# EAGLE board KeyVelocitysch (EAGLE 9.5.2)
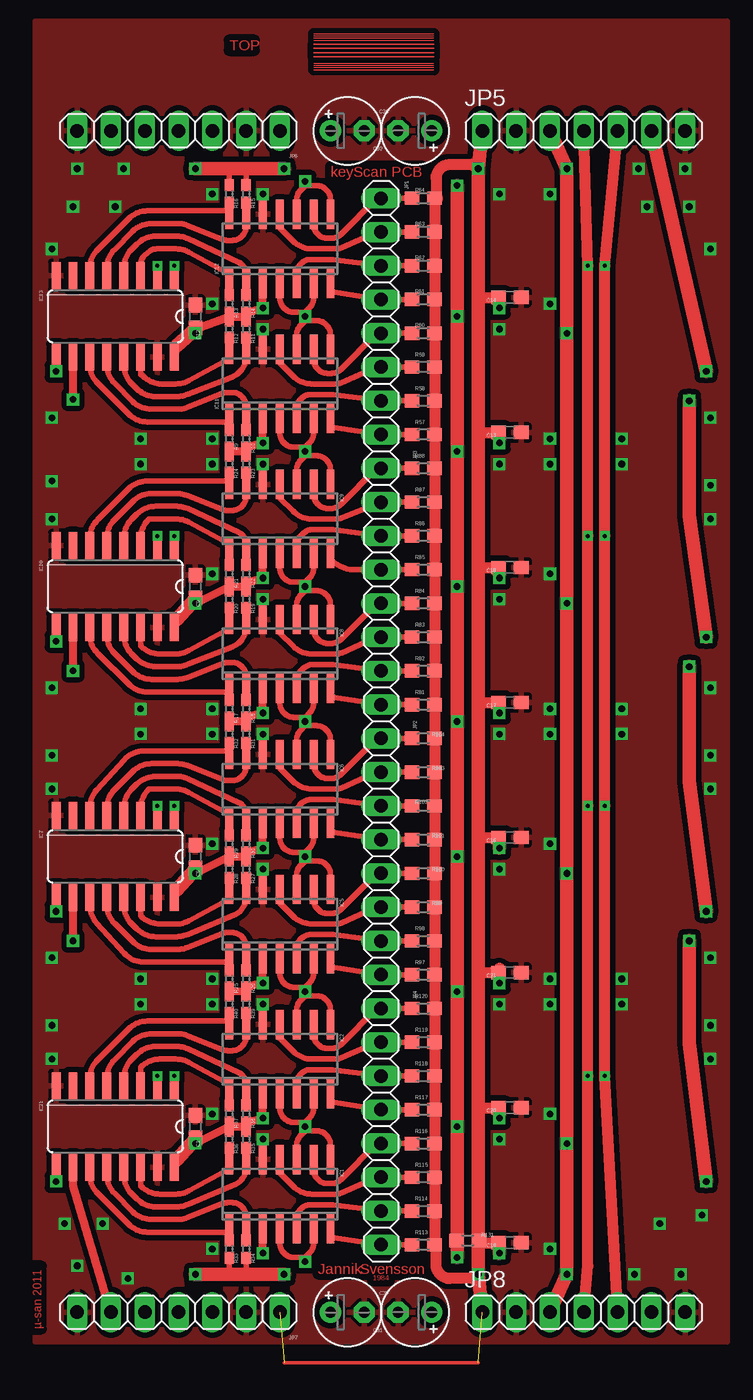
[diagram p0: board, top side]
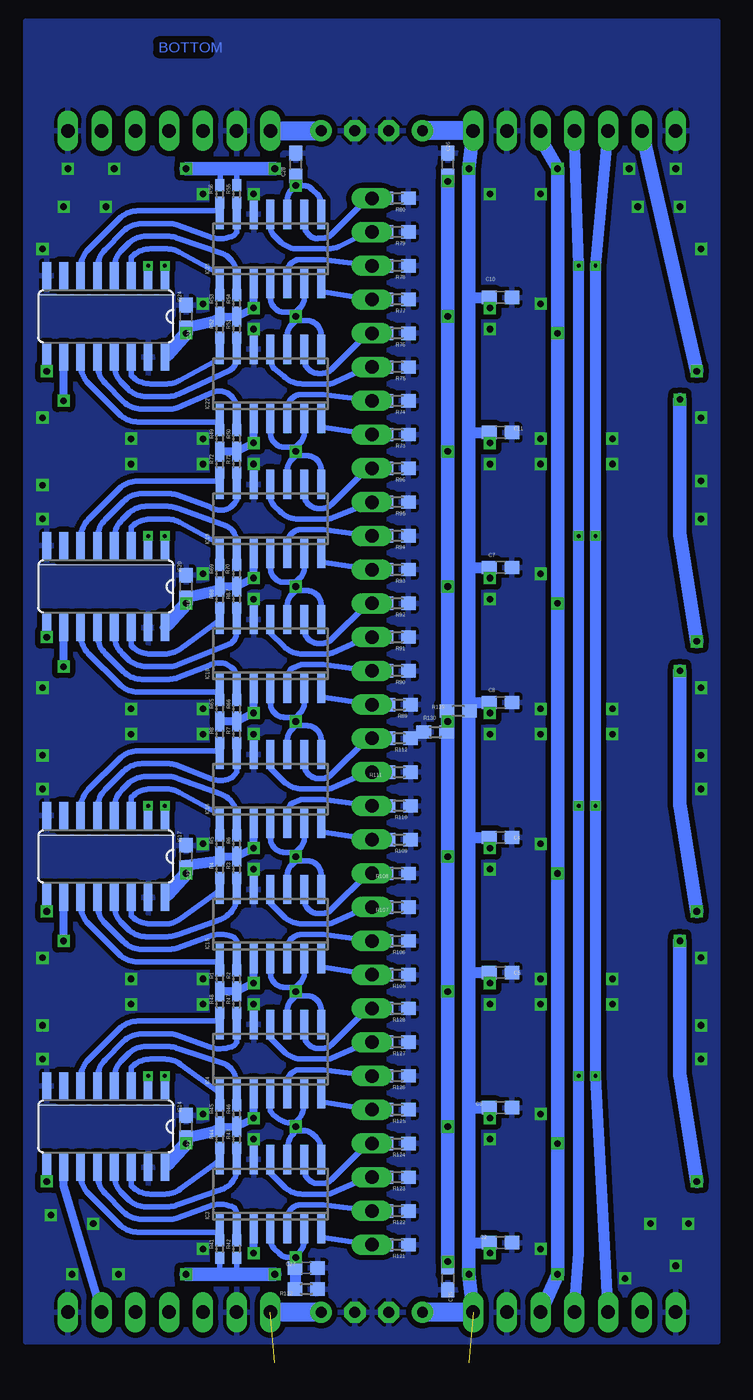
[diagram p1: board, bottom side, seen from below]

No outline drawn. Coordinates in mm, seen from the top.
Copper layers (1*16): Top 0.035mm / dielectric 1.5mm / Bottom 0.035mm
Design rules "default": minimum track width 10mil, minimum drill 24mil, track to track 8mil, track to pad 8mil, pad to pad 8mil, via to via 8mil, smd to smd 8mil, copper to edge 40mil, drill to drill 8mil, minimum pad ring 10mil, minimum via ring 8mil, stop-mask expansion 4mil, vias tented up to drill 0mil, thermal gap 10mil

## Footprints (pad centres in the part's own frame; a part is rotated, then mirrored left to right if it is on the bottom)
C0603 = smd 1.1 x 1: 1 -0.85,0; 2 0.85,0
E2,5-5 = drill 0.813 pad 1.6: + -1.27,0 | drill 0.813 pad 1.6 octagon: - 1.27,0
SO14 = smd 0.6 x 2.2: 1 -3.81,-2.6; 2 -2.54,-2.6; 3 -1.27,-2.6; 4 0,-2.6; 5 1.27,-2.6; 6 2.54,-2.6; 7 3.81,-2.6; 8 3.81,2.6; 9 2.54,2.6; 10 1.27,2.6; 11 0,2.6; 12 -1.27,2.6; 13 -2.54,2.6; 14 -3.81,2.6
SO16 = smd 0.66 x 2.032: 1 -4.445,-3.073; 2 -3.175,-3.073; 3 -1.905,-3.073; 4 -0.635,-3.073; 5 0.635,-3.073; 6 1.905,-3.073; 7 3.175,-3.073; 8 4.445,-3.073; 9 4.445,3.073; 10 3.175,3.073; 11 1.905,3.073; 12 0.635,3.073; 13 -0.635,3.073; 14 -1.905,3.073; 15 -3.175,3.073; 16 -4.445,3.073
1X08 = drill 1.016 long: 1 -8.89,0; 2 -6.35,0; 3 -3.81,0; 4 -1.27,0; 5 1.27,0; 6 3.81,0; 7 6.35,0; 8 8.89,0
1X07 = drill 1.016 long: 1 -7.62,0; 2 -5.08,0; 3 -2.54,0; 4 0,0; 5 2.54,0; 6 5.08,0; 7 7.62,0
R0402 = smd 0.9 x 0.7: 1 -0.65,0; 2 0.65,0
R0603 = smd 1.1 x 1: 1 -0.85,0; 2 0.85,0

## Placement (x,y rotation side)
C1  0u1  [C0603]  12.38,16.51 90 top
C2  0u1  [C0603]  16.67,7.78 0 bottom
C3  0u1  [C0603]  16.67,17.94 0 bottom
C4  0u1  [C0603]  16.67,38.26 0 bottom
C5  0u1  [C0603]  16.67,28.1 0 bottom
C6  0u1  [C0603]  12.38,36.83 90 top
C7  0u1  [C0603]  16.67,58.58 0 bottom
C8  0u1  [C0603]  16.67,48.42 0 bottom
C9  0u1  [C0603]  12.38,57.15 90 top
C10  0u1  [C0603]  16.67,78.9 0 bottom
C11  0u1  [C0603]  16.67,68.74 0 bottom
C12  0u1  [C0603]  12.38,77.47 90 top
C13  0u1  [C0603]  36.04,68.74 0 top
C14  0u1  [C0603]  36.04,78.9 0 top
C15  0u1  [C0603]  40.32,57.15 90 bottom
C16  0u1  [C0603]  36.04,38.26 0 top
C17  0u1  [C0603]  36.04,48.42 0 top
C18  0u1  [C0603]  36.04,58.58 0 top
C19  0u1  [C0603]  36.04,7.78 0 top
C20  0u1  [C0603]  36.04,17.94 0 top
C21  0u1  [C0603]  36.04,28.1 0 top
C22  0u1  [C0603]  40.32,36.83 90 bottom
C23  0u1  [C0603]  40.32,16.51 90 bottom
C24  0u1  [C0603]  40.32,77.47 90 bottom
C25  0u1  [C0603]  20.64,5.08 270 bottom
C26  0u1  [C0603]  20.64,88.9 90 bottom
C27  0u1  [C0603]  31.27,5.87 0 bottom
C28  0u1  [C0603]  32.07,88.9 90 bottom
C29  [E2,5-5]  23.81,91.44 0 top
C30  [E2,5-5]  23.81,2.54 0 top
C31  [E2,5-5]  28.89,2.54 180 top
C32  [E2,5-5]  28.89,91.44 180 top
IC1  LM339D  [SO14]  18.73,11.43 0 top
IC2  LM339D  [SO14]  18.73,21.59 0 top
IC3  LM339D  [SO14]  33.97,11.43 0 bottom
IC4  LM339D  [SO14]  33.97,21.59 0 bottom
IC5  LM339D  [SO14]  18.73,31.75 0 top
IC6  LM339D  [SO14]  18.73,41.91 0 top
IC7  74HC165D  [SO16]  6.35,36.83 180 top
IC8  LM339D  [SO14]  18.73,52.07 0 top
IC9  LM339D  [SO14]  18.73,62.23 0 top
IC10  74HC165D  [SO16]  6.35,57.15 180 top
IC11  LM339D  [SO14]  18.73,72.39 0 top
IC12  LM339D  [SO14]  18.73,82.55 0 top
IC13  74HC165D  [SO16]  6.35,77.47 180 top
IC14  74HC165D  [SO16]  46.35,16.51 180 bottom
IC15  LM339D  [SO14]  33.97,31.75 0 bottom
IC16  LM339D  [SO14]  33.97,41.91 0 bottom
IC17  74HC165D  [SO16]  46.35,36.83 180 bottom
IC18  LM339D  [SO14]  33.97,52.07 0 bottom
IC19  LM339D  [SO14]  33.97,62.23 0 bottom
IC20  74HC165D  [SO16]  46.35,57.15 180 bottom
IC21  74HC165D  [SO16]  6.35,16.51 180 top
IC22  LM339D  [SO14]  33.97,72.39 0 bottom
IC23  LM339D  [SO14]  33.97,82.55 0 bottom
IC24  74HC165D  [SO16]  46.35,77.47 180 bottom
JP1  [1X08]  26.35,77.47 270 top
JP2  [1X08]  26.35,36.83 270 top
JP3  [1X08]  26.35,57.15 270 top
JP4  [1X08]  26.35,16.51 270 top
JP5  [1X07]  41.59,91.44 0 top
JP6  [1X07]  11.11,91.44 180 top
JP7  [1X07]  11.11,2.54 180 top
JP8  [1X07]  41.59,2.54 0 top
R1  [R0402]  37.78,27.62 270 bottom
R2  [R0402]  36.51,27.62 270 bottom
R3  [R0402]  36.51,35.88 90 bottom
R4  [R0402]  37.78,35.88 90 bottom
R5  [R0402]  37.78,37.78 270 bottom
R6  [R0402]  36.51,37.78 270 bottom
R7  [R0402]  36.51,46.04 90 bottom
R8  [R0402]  37.78,46.04 90 bottom
R9  [R0402]  14.92,68.26 270 top
R10  [R0402]  16.19,68.26 270 top
R11  [R0402]  16.19,76.52 90 top
R12  [R0402]  14.92,76.52 90 top
R13  [R0402]  14.92,78.42 270 top
R14  [R0402]  16.19,78.42 270 top
R15  [R0402]  16.19,86.68 90 top
R16  [R0402]  14.92,86.68 90 top
R17  [R0402]  14.92,47.94 270 top
R18  [R0402]  16.19,47.94 270 top
R19  [R0402]  16.19,56.2 90 top
R20  [R0402]  14.92,56.2 90 top
R21  [R0402]  14.92,58.1 270 top
R22  [R0402]  16.19,58.1 270 top
R23  [R0402]  16.19,66.36 90 top
R24  [R0402]  14.92,66.36 90 top
R25  [R0402]  14.92,27.62 270 top
R26  [R0402]  16.19,27.62 270 top
R27  [R0402]  16.19,35.88 90 top
R28  [R0402]  14.92,35.88 90 top
R29  [R0402]  14.92,37.78 270 top
R30  [R0402]  16.19,37.78 270 top
R31  [R0402]  16.19,46.04 90 top
R32  [R0402]  14.92,46.04 90 top
R33  [R0402]  14.92,7.3 270 top
R34  [R0402]  16.19,7.3 270 top
R35  [R0402]  16.19,15.56 90 top
R36  [R0402]  14.92,15.56 90 top
R37  [R0402]  14.92,17.46 270 top
R38  [R0402]  16.19,17.46 270 top
R39  [R0402]  16.19,25.72 90 top
R40  [R0402]  14.92,25.72 90 top
R41  [R0402]  37.78,7.3 270 bottom
R42  [R0402]  36.51,7.3 270 bottom
R43  [R0402]  36.51,15.56 90 bottom
R44  [R0402]  37.78,15.56 90 bottom
R45  [R0402]  37.78,17.46 270 bottom
R46  [R0402]  36.51,17.46 270 bottom
R47  [R0402]  36.51,25.72 90 bottom
R48  [R0402]  37.78,25.72 90 bottom
R49  [R0402]  37.78,68.26 270 bottom
R50  [R0402]  36.51,68.26 270 bottom
R51  [R0402]  36.51,76.52 90 bottom
R52  [R0402]  37.78,76.52 90 bottom
R53  [R0402]  37.78,78.42 270 bottom
R54  [R0402]  36.51,78.42 270 bottom
R55  [R0402]  36.51,86.68 90 bottom
R56  [R0402]  37.78,86.68 90 bottom
R57  [R0603]  29.53,68.58 0 top
R58  [R0603]  29.53,71.12 0 top
R59  [R0603]  29.53,73.66 0 top
R60  [R0603]  29.53,76.2 0 top
R61  [R0603]  29.53,78.74 0 top
R62  [R0603]  29.53,81.28 0 top
R63  [R0603]  29.53,83.82 0 top
R64  [R0603]  29.53,86.36 0 top
R65  [R0402]  37.78,47.94 270 bottom
R66  [R0402]  36.51,47.94 270 bottom
R67  [R0402]  36.51,56.2 90 bottom
R68  [R0402]  37.78,56.2 90 bottom
R69  [R0402]  37.78,58.1 270 bottom
R70  [R0402]  36.51,58.1 270 bottom
R71  [R0402]  36.51,66.36 90 bottom
R72  [R0402]  37.78,66.36 90 bottom
R73  [R0603]  24.45,68.58 180 bottom
R74  [R0603]  24.45,71.12 180 bottom
R75  [R0603]  24.45,73.66 180 bottom
R76  [R0603]  24.45,76.2 180 bottom
R77  [R0603]  24.45,78.74 180 bottom
R78  [R0603]  24.45,81.28 180 bottom
R79  [R0603]  24.45,83.82 180 bottom
R80  [R0603]  24.45,86.36 180 bottom
R81  [R0603]  29.53,48.26 0 top
R82  [R0603]  29.53,50.8 0 top
R83  [R0603]  29.53,53.34 0 top
R84  [R0603]  29.53,55.88 0 top
R85  [R0603]  29.53,58.42 0 top
R86  [R0603]  29.53,60.96 0 top
R87  [R0603]  29.53,63.5 0 top
R88  [R0603]  29.53,66.04 0 top
R89  [R0603]  24.29,48.26 180 bottom
R90  [R0603]  24.45,50.8 180 bottom
R91  [R0603]  24.45,53.34 180 bottom
R92  [R0603]  24.45,55.88 180 bottom
R93  [R0603]  24.45,58.42 180 bottom
R94  [R0603]  24.45,60.96 180 bottom
R95  [R0603]  24.45,63.5 180 bottom
R96  [R0603]  24.45,66.04 180 bottom
R97  [R0603]  29.53,27.94 0 top
R98  [R0603]  29.53,30.48 0 top
R99  [R0603]  29.53,33.02 0 top
R100  [R0603]  29.53,35.56 0 top
R101  [R0603]  29.53,38.1 0 top
R102  [R0603]  29.53,40.64 0 top
R103  [R0603]  29.53,43.18 0 top
R104  [R0603]  29.53,45.72 0 top
R105  [R0603]  24.45,27.94 180 bottom
R106  [R0603]  24.45,30.48 180 bottom
R107  [R0603]  24.45,33.02 180 bottom
R108  [R0603]  24.45,35.56 180 bottom
R109  [R0603]  24.29,38.1 180 bottom
R110  [R0603]  24.29,40.64 180 bottom
R111  [R0603]  24.29,43.18 180 bottom
R112  [R0603]  24.29,45.72 180 bottom
R113  [R0603]  29.53,7.62 0 top
R114  [R0603]  29.53,10.16 0 top
R115  [R0603]  29.53,12.7 0 top
R116  [R0603]  29.53,15.24 0 top
R117  [R0603]  29.53,17.78 0 top
R118  [R0603]  29.53,20.32 0 top
R119  [R0603]  29.53,22.86 0 top
R120  [R0603]  29.53,25.4 0 top
R121  [R0603]  24.45,7.62 180 bottom
R122  [R0603]  24.45,10.16 180 bottom
R123  [R0603]  24.45,12.7 180 bottom
R124  [R0603]  24.45,15.24 180 bottom
R125  [R0603]  24.45,17.78 180 bottom
R126  [R0603]  24.45,20.32 180 bottom
R127  [R0603]  24.45,22.86 180 bottom
R128  [R0603]  24.45,25.4 180 bottom
R129  4k7  [R0603]  19.84,47.78 0 bottom
R130  1k  [R0603]  21.59,46.2 0 bottom
R131  1k  [R0603]  32.86,7.94 0 top
R132  4k7  [R0603]  31.27,4.29 180 bottom

## Library data of the parts
C1-C32 R1-R132 = rcl
IC1-IC6 IC8 IC9 IC11 IC12 IC15 IC16 IC18 IC19 IC22 IC23 = linear
IC7 IC10 IC13 IC14 IC17 IC20 IC21 IC24 = 74xx-eu
JP1-JP8 = pinhead

## Nets
+5V: C1.1 C2.1 C3.1 C4.1 C5.1 C6.1 C7.1 C8.1 C9.1 C10.1 C11.1 C12.1 C13.1 C14.1 C15.1 C16.1 C17.1 C18.1 C19.1 C20.1 C21.1 C22.1 C23.1 C24.1 C29.+ C30.+ C31.+ C32.+ IC1.3 IC2.3 IC3.3 IC4.3 IC5.3 IC6.3 IC7.16 IC8.3 IC9.3 IC10.16 IC11.3 IC12.3 IC13.16 IC14.16 IC15.3 IC16.3 IC17.16 IC18.3 IC19.3 IC20.16 IC21.16 IC22.3 IC23.3 IC24.16 JP5.1 JP5.3 JP6.1 JP6.3 JP7.1 JP7.3 JP8.1 JP8.3 R1.2 R2.2 R3.2 R4.2 R5.2 R6.2 R7.2 R8.2 R9.2 R10.2 R11.2 R12.2 R13.2 R14.2 R15.2 R16.2 R17.2 R18.2 R19.2 R20.2 R21.2 R22.2 R23.2 R24.2 R25.2 R26.2 R27.2 R28.2 R29.2 R30.2 R31.2 R32.2 R33.2 R34.2 R35.2 R36.2 R37.2 R38.2 R39.2 R40.2 R41.2 R42.2 R43.2 R44.2 R45.2 R46.2 R47.2 R48.2 R49.2 R50.2 R51.2 R52.2 R53.2 R54.2 R55.2 R56.2 R57.2 R58.2 R59.2 R60.2 R61.2 R62.2 R63.2 R64.2 R65.2 R66.2 R67.2 R68.2 R69.2 R70.2 R71.2 R72.2 R81.2 R82.2 R83.2 R84.2 R85.2 R86.2 R87.2 R88.2 R97.2 R98.2 R99.2 R100.2 R101.2 R102.2 R103.2 R104.2 R113.2 R114.2 R115.2 R116.2 R117.2 R118.2 R119.2 R120.2 R129.2 R131.2
CLK_A: IC7.2 IC10.2 IC13.2 IC21.2 JP6.5 JP7.5
CLK_B: IC14.2 IC17.2 IC20.2 IC24.2 JP5.5 JP8.5
DA1: IC12.14 IC13.6 R16.1
DA8: IC11.1 IC13.11 R9.1
DA9: IC9.14 IC10.6 R24.1
DA16: IC8.1 IC10.11 R17.1
DA17: IC6.14 IC7.6 R32.1
DA24: IC5.1 IC7.11 R25.1
DA25: IC2.14 IC21.6 R40.1
DA32: IC1.1 IC21.11 R33.1
DB1: IC23.14 IC24.6 R56.1
DB8: IC22.1 IC24.11 R49.1
DB9: IC19.14 IC20.6 R72.1
DB16: IC18.1 IC20.11 R65.1
DB17: IC16.14 IC17.6 R8.1
DB24: IC15.1 IC17.11 R1.1
DB25: IC4.14 IC14.6 R48.1
DB32: IC3.1 IC14.11 R41.1
DIN_A: IC21.10 JP7.6
DIN_B: IC14.10 JP8.6
DOUT_A: IC13.9 JP6.6
DOUT_B: IC24.9 JP5.6
GND: C1.2 C2.2 C3.2 C4.2 C5.2 C6.2 C7.2 C8.2 C9.2 C10.2 C11.2 C12.2 C13.2 C14.2 C15.2 C16.2 C17.2 C18.2 C19.2 C20.2 C21.2 C22.2 C23.2 C24.2 C25.2 C26.2 C27.2 C28.2 C29.- C30.- C31.- C32.- IC1.12 IC2.12 IC3.12 IC4.12 IC5.12 IC6.12 IC7.8 IC7.15 IC8.12 IC9.12 IC10.8 IC10.15 IC11.12 IC12.12 IC13.8 IC13.15 IC14.8 IC14.15 IC15.12 IC16.12 IC17.8 IC17.15 IC18.12 IC19.12 IC20.8 IC20.15 IC21.8 IC21.15 IC22.12 IC23.12 IC24.8 IC24.15 JP5.2 JP5.7 JP6.2 JP6.7 JP7.2 JP7.7 JP8.2 JP8.7 R73.1 R74.1 R75.1 R76.1 R77.1 R78.1 R79.1 R80.1 R89.1 R90.1 R91.1 R92.1 R93.1 R94.1 R95.1 R96.1 R105.1 R106.1 R107.1 R108.1 R109.1 R110.1 R111.1 R112.1 R121.1 R122.1 R123.1 R124.1 R125.1 R126.1 R127.1 R128.1 R130.1 R132.1
KI1: IC12.9 IC23.9 JP1.1 R64.1 R80.2
KI2: IC12.11 IC23.11 JP1.2 R63.1 R79.2
KI3: IC12.5 IC23.5 JP1.3 R62.1 R78.2
KI4: IC12.7 IC23.7 JP1.4 R61.1 R77.2
KI5: IC11.9 IC22.9 JP1.5 R60.1 R76.2
KI6: IC11.11 IC22.11 JP1.6 R59.1 R75.2
KI7: IC11.5 IC22.5 JP1.7 R58.1 R74.2
KI8: IC11.7 IC22.7 JP1.8 R57.1 R73.2
KI9: IC9.9 IC19.9 JP3.1 R88.1 R96.2
KI10: IC9.11 IC19.11 JP3.2 R87.1 R95.2
KI11: IC9.5 IC19.5 JP3.3 R86.1 R94.2
KI12: IC9.7 IC19.7 JP3.4 R85.1 R93.2
KI13: IC8.9 IC18.9 JP3.5 R84.1 R92.2
KI14: IC8.11 IC18.11 JP3.6 R83.1 R91.2
KI15: IC8.5 IC18.5 JP3.7 R82.1 R90.2
KI16: IC8.7 IC18.7 JP3.8 R81.1 R89.2
KI17: IC6.9 IC16.9 JP2.1 R104.1 R112.2
KI18: IC6.11 IC16.11 JP2.2 R103.1 R111.2
KI19: IC6.5 IC16.5 JP2.3 R102.1 R110.2
KI20: IC6.7 IC16.7 JP2.4 R101.1 R109.2
KI21: IC5.9 IC15.9 JP2.5 R100.1 R108.2
KI22: IC5.11 IC15.11 JP2.6 R99.1 R107.2
KI23: IC5.5 IC15.5 JP2.7 R98.1 R106.2
KI24: IC5.7 IC15.7 JP2.8 R97.1 R105.2
KI25: IC2.9 IC4.9 JP4.1 R120.1 R128.2
KI26: IC2.11 IC4.11 JP4.2 R119.1 R127.2
KI27: IC2.5 IC4.5 JP4.3 R118.1 R126.2
KI28: IC2.7 IC4.7 JP4.4 R117.1 R125.2
KI29: IC1.9 IC3.9 JP4.5 R116.1 R124.2
KI30: IC1.11 IC3.11 JP4.6 R115.1 R123.2
KI31: IC1.5 IC3.5 JP4.7 R114.1 R122.2
KI32: IC1.7 IC3.7 JP4.8 R113.1 R121.2
LATCH_A: IC7.1 IC10.1 IC13.1 IC21.1 JP6.4 JP7.4
LATCH_B: IC14.1 IC17.1 IC20.1 IC24.1 JP5.4 JP8.4
N$1: IC14.9 IC17.10
N$2: IC17.9 IC20.10
N$4: IC12.13 IC13.5 R15.1
N$5: IC20.9 IC24.10
N$9: IC12.2 IC13.4 R14.1
N$10: IC12.1 IC13.3 R13.1
N$11: IC11.14 IC13.14 R12.1
N$12: IC7.10 IC21.9
N$13: IC11.13 IC13.13 R11.1
N$14: IC11.2 IC13.12 R10.1
N$17: IC8.2 IC10.12 R18.1
N$18: IC8.13 IC10.13 R19.1
N$19: IC8.14 IC10.14 R20.1
N$20: IC9.1 IC10.3 R21.1
N$21: IC9.2 IC10.4 R22.1
N$22: IC7.9 IC10.10
N$23: IC9.13 IC10.5 R23.1
N$25: IC10.9 IC13.10
N$27: IC5.2 IC7.12 R26.1
N$28: IC5.13 IC7.13 R27.1
N$29: IC5.14 IC7.14 R28.1
N$30: IC6.1 IC7.3 R29.1
N$33: IC6.2 IC7.4 R30.1
N$35: IC6.13 IC7.5 R31.1
N$38: IC1.2 IC21.12 R34.1
N$39: IC1.13 IC21.13 R35.1
N$40: IC1.14 IC21.14 R36.1
N$41: IC2.1 IC21.3 R37.1
N$42: IC2.2 IC21.4 R38.1
N$43: IC2.13 IC21.5 R39.1
N$46: IC22.2 IC24.12 R50.1
N$47: IC22.13 IC24.13 R51.1
N$48: IC22.14 IC24.14 R52.1
N$49: IC23.1 IC24.3 R53.1
N$50: IC23.2 IC24.4 R54.1
N$51: IC23.13 IC24.5 R55.1
N$54: IC18.2 IC20.12 R66.1
N$55: IC18.13 IC20.13 R67.1
N$56: IC18.14 IC20.14 R68.1
N$57: IC19.1 IC20.3 R69.1
N$58: IC19.2 IC20.4 R70.1
N$59: IC19.13 IC20.5 R71.1
N$62: IC15.2 IC17.12 R2.1
N$63: IC15.13 IC17.13 R3.1
N$64: IC15.14 IC17.14 R4.1
N$65: IC16.1 IC17.3 R5.1
N$66: IC16.2 IC17.4 R6.1
N$67: IC16.13 IC17.5 R7.1
N$70: IC3.2 IC14.12 R42.1
N$71: IC3.13 IC14.13 R43.1
N$72: IC3.14 IC14.14 R44.1
N$73: IC4.1 IC14.3 R45.1
N$74: IC4.2 IC14.4 R46.1
N$75: IC4.13 IC14.5 R47.1
VREF_A_COMP: C25.1 C26.1 IC1.4 IC1.6 IC1.8 IC1.10 IC2.4 IC2.6 IC2.8 IC2.10 IC5.4 IC5.6 IC5.8 IC5.10 IC6.4 IC6.6 IC6.8 IC6.10 IC8.4 IC8.6 IC8.8 IC8.10 IC9.4 IC9.6 IC9.8 IC9.10 IC11.4 IC11.6 IC11.8 IC11.10 IC12.4 IC12.6 IC12.8 IC12.10 R129.1 R130.2
VREF_B_COMP: C27.1 C28.1 IC3.4 IC3.6 IC3.8 IC3.10 IC4.4 IC4.6 IC4.8 IC4.10 IC15.4 IC15.6 IC15.8 IC15.10 IC16.4 IC16.6 IC16.8 IC16.10 IC18.4 IC18.6 IC18.8 IC18.10 IC19.4 IC19.6 IC19.8 IC19.10 IC22.4 IC22.6 IC22.8 IC22.10 IC23.4 IC23.6 IC23.8 IC23.10 R131.1 R132.2

## Tracks (layer width: path | path; a pad name or v marks a point on that pad's centre or on a via)
+5V  (via drill 0.5)  (3 unrouted)
  Top 0.254: 19.05,-1.27 33.66,-1.27
  Top 0.406: IC13.16 10.79,73.98 10.69,74.4 | R29.2 14.92,37.15 | 14.92,36.83 R28.2 | 16.19,46.67 R31.2 16.19,46.99 R18.2 | 14.92,46.67 R32.2 R17.2 | 14.92,56.83 R20.2 14.92,57.15 | 16.19,66.99 R23.2 16.19,67.31 R10.2 | 14.92,66.99 R24.2 R9.2 | 16.19,56.83 R19.2 16.19,57.15 R22.2 | 16.19,77.15 R11.2 16.19,77.47 R14.2 | 14.92,77.15 R12.2 14.92,77.47 | 16.19,87.31 R15.2 16.19,88.58 | 16.19,36.51 R27.2 16.19,36.83 R30.2 | 14.92,26.99 R25.2 R40.2 | 16.18,26.66 16.19,26.99 R26.2 R39.2 | 16.19,16.19 R35.2 16.19,16.51 R38.2 | 14.92,16.19 R36.2 14.92,16.51 | 16.19,6.67 R34.2 16.19,5.4 | R114.2 30.48,10.16 30.38,10.06 | R115.2 30.16,12.7 30.38,12.48 | R116.2 30.48,15.24 30.38,15.14 | R117.2 30.48,17.78 30.38,17.68 | R118.2 30.48,20.32 30.38,20.22 | R119.2 30.48,22.86 30.38,22.76 | R120.2 30.16,25.4 30.38,25.18 | R97.2 30.48,27.94 30.38,27.84 | R98.2 30.48,30.48 30.38,30.38 | R99.2 30.48,33.02 30.38,32.92 | R100.2 30.48,35.56 30.38,35.46 | R101.2 30.48,38.1 30.38,38 | R102.2 30.48,40.64 30.38,40.54 | R103.2 30.48,43.18 30.38,43.08 | R104.2 30.48,45.72 30.38,45.62 | R81.2 30.48,48.26 30.38,48.16 | R82.2 30.48,50.8 30.38,50.7 | R83.2 30.48,53.34 30.38,53.24 | R84.2 30.48,55.88 30.38,55.78 | R85.2 30.48,58.42 30.38,58.32 | R86.2 30.48,60.96 30.38,60.86 | R87.2 30.48,63.5 30.38,63.4 | R88.2 30.48,66.04 30.38,65.94 | R57.2 30.48,68.58 30.38,68.48 | R58.2 30.48,71.12 30.38,71.02 | R59.2 30.48,73.66 30.38,73.56 | R60.2 30.48,76.2 30.38,76.1 | R61.2 30.48,78.74 30.38,78.64 | R62.2 30.48,81.28 30.38,81.18 | R63.2 30.48,83.82 30.38,83.72 | 30.48,86.36 30.38,86.26 | 14.92,88.58 R16.2 | 14.92,5.4 R33.2 | 35.24,78.9 35.24,78.42 | 12.38,36.04 C6.1 v12.38,35.56 | 33.66,7.94 R131.2
  Top 0.406: 35.24,68.26 v35.24,67.94 | 12.38,76.68 C12.1 v12.38,76.2 | 12.38,56.36 C9.1 v12.38,55.88 | 35.24,48.42 35.08,48.42 35.24,48.26 v35.24,47.62
  Top 0.61: IC2.3 v17.46,17.14 R38.2 | v17.46,6.99 IC1.3 | IC6.3 v17.46,37.47 R30.2 | IC5.3 v17.46,27.3 R26.2 | IC9.3 v17.46,57.78 R22.2 | IC8.3 v17.46,47.62 R18.2 | IC12.3 v17.46,78.11 R14.2 | IC11.3 v17.46,67.94 R10.2 | 10.95,75.25 IC13.16 | 14.92,36.83 16.19,36.83 | 14.92,36.83 R29.2 | 16.19,46.99 14.92,46.99 R17.2 | 14.92,57.15 16.19,57.15 | 14.92,57.15 R21.2 | 16.19,67.31 14.92,67.31 R9.2 | 14.92,77.47 16.19,77.47 | 14.92,77.47 R13.2 | 10.95,34.29 IC7.16 | IC21.16 10.95,13.97 | 10.95,54.61 IC10.16 | 16.18,26.66 14.92,26.67 R25.2 | 14.92,16.51 R37.2 | 14.92,16.51 16.19,16.51 | v12.38,35.56 14.92,36.83 | v12.38,15.24 14.92,16.51 | v12.38,55.88 14.92,57.15 | 12.38,76.52 14.92,77.47 | C17.1 v35.24,47.62
  Top 0.813: C12.1 12.38,76.52 | 30.38,10.06 R113.2 | 30.38,12.48 R114.2 | 30.38,15.14 R115.2 | 30.38,17.68 R116.2 | 30.38,20.22 R117.2 | 30.38,22.76 R118.2 | 30.38,25.18 R119.2 | 30.38,27.84 R120.2 | 30.38,30.38 R97.2 | 30.38,32.92 R98.2 | 30.38,35.46 R99.2 | 30.38,38 R100.2 | 30.38,40.54 R101.2 | 30.38,43.08 R102.2 | 30.38,45.62 R103.2 | 30.38,48.16 R104.2 | 30.38,50.7 R81.2 | 30.38,53.24 R82.2 | 30.38,55.78 R83.2 | 30.38,58.32 R84.2 | 30.38,60.86 R85.2 | 30.38,63.4 R86.2 | 30.38,65.94 R87.2 | 30.38,68.48 R88.2 | 30.38,71.02 R57.2 | 30.38,73.56 R58.2 | 30.38,76.1 R59.2 | 30.38,78.64 R60.2 | 30.38,81.18 R61.2 | 30.38,83.72 R62.2 | 30.38,86.26 R63.2 | 33.34,88.9 31.53,88.9 arc45 30.82,88.61 30.77,88.56 arc45 30.48,87.85 30.48,86.36 | 30.48,7.62 30.48,6.13 arc45 30.77,5.42 30.82,5.37 arc45 31.53,5.08 33.34,5.08 | 33.66,78.9 35.24,78.9 | 35.24,68.26 35.24,68.74 33.66,68.74 | 35.24,58.58 C18.1 | 35.24,58.58 v35.24,57.78 | 33.66,58.58 35.24,58.58 | 33.66,48.42 35.08,48.42 C17.1 35.24,48.42 | 33.66,38.26 35.24,38.26 | v35.24,27.3 35.24,28.42 C21.1 33.66,28.1 | 33.66,17.94 C20.1 35.24,17.94 | 33.66,7.78 C19.1 35.24,7.78
  Top 1.016: 12.38,76.52 10.95,75.25 | C6.1 12.38,35.88 10.95,34.29 | C1.1 12.38,15.56 10.95,13.97 | C9.1 12.38,56.2 10.95,54.61 | C18.1 35.24,58.1 | 35.24,68.26 C13.1 | 35.24,78.42 C14.1 | v35.24,37.47 35.24,37.78 C16.1 | C19.1 v35.24,6.99 | C20.1 35.24,17.46 | v33.66,88.58 33.66,78.9 33.66,68.74 33.66,58.58 33.66,48.42 33.66,38.26 33.66,28.1 33.66,17.94 33.66,7.94 33.66,7.78 v33.66,5.4 | v33.66,88.58 33.34,88.9 | 30.48,86.36 R64.2 | v33.66,5.4 33.34,5.08 | v19.05,88.58 16.19,88.58 14.92,88.58 v12.38,88.58 | v12.38,5.4 14.92,5.4 16.19,5.4 v19.05,5.4 | JP8.3 v40.32,5.4 v40.32,15.24 v40.32,35.56 v40.32,55.88 v40.32,76.2 v40.32,88.58 JP5.3 | JP8.1 v33.66,5.4 | v33.66,88.58 JP5.1
  Bottom 0.406: 41.91,13.34 42.01,13.44 | IC17.16 41.91,33.66 42.01,33.76 | IC20.16 41.75,54.29 42.13,54.08 | IC24.16 41.91,74.3 42.01,74.4 | R44.2 R45.2 37.78,16.83 37.77,16.5 | 36.51,16.19 R43.2 36.51,16.51 R46.2 | R2.2 36.51,26.67 R47.2 | 37.78,26.67 R48.2 | 36.51,36.51 R3.2 36.51,36.83 R6.2 | 36.51,46.67 R7.2 36.51,46.99 R66.2 | R65.2 37.78,46.99 R8.2 37.78,46.67 | R70.2 36.51,57.15 R67.2 | R50.2 36.51,67.31 R71.2 | R54.2 36.51,77.47 R51.2 | 37.78,87.31 37.77,87.33 37.77,88.25 37.78,88.58 | 36.51,6.67 R42.2 | 36.51,6.67 36.53,6.65 | v40.32,15.24 C23.1 | 40.32,36.2 C22.1 v40.32,35.56 | v40.32,55.88 C15.1 | v40.32,76.2 C24.1 | R68.2 37.78,57.15 R69.2 | R4.2 37.78,36.83 R5.2 | R48.2 37.78,26.35 | R48.2 R1.2 | 36.51,88.58 R55.2 | 36.51,5.4 36.51,6.67 | 37.78,5.4 R41.2 | R129.2 19.05,47.73 19.05,47.62 | 12.33,15.66 12.22,15.56 12.22,15.4 v12.38,15.24 | 12.38,15.18 12.33,15.66 | 12.33,15.66 12.38,15.72 | 12.38,15.72
  Bottom 0.61: 41.91,13.34 IC14.16 41.75,13.65 | 37.77,16.5 36.51,16.51 v35.24,17.14 IC4.3 | 36.51,26.67 37.78,26.67 | 37.78,36.83 36.51,36.83 v35.24,37.47 IC16.3 | 37.78,46.99 36.51,46.99 v35.24,47.62 IC18.3 | 37.78,57.15 36.51,57.15 v35.24,57.78 IC19.3 | 37.78,67.31 36.51,67.31 v35.24,67.94 IC22.3 | 37.78,77.47 36.51,77.47 v35.24,78.11 IC23.3 | R42.2 36.53,6.65 | 41.75,74.61 IC24.16 | 41.75,33.97 IC17.16 | v35.24,6.99 IC3.3 | 37.78,87.31 R56.2 | R52.2 37.78,77.47 | 37.78,77.47 R53.2 | 37.78,67.31 R72.2 | 37.78,67.31 R49.2 | R47.2 36.5,26.68 v35.24,27.3 IC15.3
  Bottom 0.813: C23.1 40.38,15.66 38.1,16.19 37.78,16.19 R44.2 | 40.32,36.2 37.94,36.51 37.78,36.51 R4.2 | C15.1 40.38,56.3 38.1,56.83 37.78,56.83 R68.2 | C24.1 40.38,76.62 38.1,77.15 37.78,77.15 R52.2 | 19.05,68.74 C11.1 17.46,68.74 v17.46,67.94 | 19.05,78.9 C10.1 | 19.05,58.58 C7.1 | 19.05,48.42 C8.1 17.46,48.42 v17.46,47.62 | 19.05,7.78 C2.1 17.46,7.78 v17.46,6.99 | 19.05,17.94 C3.1 | 19.05,28.1 C5.1 17.46,28.1 v17.46,27.3 | 19.05,38.26 C4.1 | 19.05,38.26
  Bottom 1.016: 12.38,15.18 C1.1 12.38,15.72 v12.38,35.56 v12.38,55.88 v12.38,76.2 v12.38,88.58 13.65,90.81 JP6.3 | v40.32,55.88 41.75,54.29 | v40.32,76.2 41.75,74.61 | v40.32,35.56 41.75,33.97 | v40.32,15.24 41.75,13.65 | v33.66,88.58 36.51,88.58 37.78,88.58 v40.32,88.58 | 12.38,15.18 v12.38,5.4 JP7.3 | 12.38,15.18 v12.38,15.24 | v33.66,5.4 36.51,5.4 37.78,5.4 v40.32,5.4 | JP7.1 v19.05,5.4 19.05,7.78 19.05,17.94 19.05,28.1 19.05,38.26 19.05,47.62 19.05,48.42 19.05,58.58 19.05,68.74 19.05,78.9 v19.05,88.58 JP6.1
  Bottom 1.422: JP7.1 C30.+ | C31.+ JP8.1 | JP5.1 C32.+ | JP6.1 C29.+
CLK_A  (via drill 0.3)
  Top 0.406: v9.53,60.96 IC10.2 | v9.53,40.64 IC7.2 | v9.53,20.32 IC21.2 | v9.53,81.28 IC13.2
  Bottom 0.813: JP6.5 v9.53,81.28 v9.53,60.96 v9.53,40.64 v9.53,20.32 JP7.5
CLK_B  (via drill 0.3)
  Top 0.813: JP5.5 v43.18,81.28 v43.18,60.96 v43.18,40.64 v43.18,20.32 JP8.5
  Bottom 0.61: v43.18,20.32 IC14.2 | v43.18,40.64 IC17.2 | v43.18,60.96 IC20.2 | 43.18,80.33 IC24.2 v43.18,81.28
DA1
  Top 0.406: IC13.6 4.45,81.09 arc-45 5.03,82.5 7.35,84.82 arc-45 8.77,85.41 14.92,85.41 | 14.92,85.41 IC12.14 | 14.92,85.41 R16.1
DA8
  Top 0.406: IC13.11 4.45,73.85 arc45 5.03,72.44 7.35,70.12 arc45 8.77,69.53 14.92,69.53 | 14.92,69.53 IC11.1 | 14.92,69.53 R9.1
DA9
  Top 0.406: IC10.6 4.45,60.77 arc-45 5.03,62.18 7.35,64.5 arc-45 8.77,65.09 14.92,65.09 14.92,64.93 | 14.92,64.93 IC9.14 | 14.92,64.93 R24.1
DA16
  Top 0.406: 14.92,49.21 IC8.1 | IC10.11 4.45,53.53 arc45 5.03,52.12 7.35,49.8 arc45 8.77,49.21 14.92,49.21 | 14.92,48.58 R17.1 14.92,49.21
DA17
  Top 0.406: IC7.6 4.45,40.5 arc-42 4.96,41.85 7.03,44.11 arc-48 8.51,44.77 14.92,44.77 | 14.92,44.77 IC6.14 | 14.92,44.77 R32.1
DA24
  Top 0.406: 14.92,28.89 IC5.1 | IC7.11 4.45,33.16 arc42 4.96,31.81 7.03,29.55 arc48 8.51,28.89 14.92,28.89 | 14.92,28.26 R25.1 14.92,28.89
DA25
  Top 0.406: IC21.6 4.45,20.13 arc-45 5.03,21.54 7.35,23.86 arc-45 8.77,24.45 14.92,24.45 | 14.92,24.45 IC2.14 | 14.92,24.45 R40.1
DA32
  Top 0.406: IC21.11 4.45,12.89 arc45 5.03,11.48 7.35,9.16 arc45 8.77,8.57 14.92,8.57 | 14.92,8.57 IC1.1 | 14.92,7.94 R33.1 14.92,8.57
DB1
  Bottom 0.406: IC24.6 48.26,81.09 arc45 47.67,82.5 45.35,84.82 arc45 43.94,85.41 37.78,85.41
  Bottom 0.61: IC23.14 37.78,85.41 R56.1
DB8
  Bottom 0.406: 37.78,69.53 43.94,69.53 arc45 45.35,70.12 47.67,72.44 arc45 48.26,73.85 IC24.11
  Bottom 0.61: 37.78,68.9 R49.1 37.78,69.53 IC22.1
DB9
  Bottom 0.406: IC20.6 48.26,60.77 arc45 47.67,62.18 45.35,64.5 arc45 43.94,65.09 37.78,65.09
  Bottom 0.61: IC19.14 37.78,65.09 R72.1
DB16
  Bottom 0.406: 37.78,49.21 43.94,49.21 arc45 45.35,49.8 47.67,52.12 arc45 48.26,53.53 IC20.11 | 37.78,48.58 R65.1 37.78,49.21 | 37.78,49.21 IC18.1
DB17
  Bottom 0.406: IC17.6 48.26,40.45 arc45 47.67,41.86 45.35,44.18 arc45 43.94,44.77 37.78,44.77 | R8.1 37.78,44.77 | 37.78,44.77 IC16.14
DB24
  Bottom 0.406: 37.78,28.89 43.94,28.89 arc45 45.35,29.48 47.67,31.8 arc45 48.26,33.21 IC17.11 | 37.78,28.26 R1.1 37.78,28.89 | 37.78,28.89 IC15.1
DB25
  Bottom 0.406: 37.78,24.45 43.94,24.45 arc-45 45.35,23.86 47.67,21.54 arc-45 48.26,20.13 IC14.6 | 37.78,24.45 IC4.14 | R48.1 37.78,24.45
DB32
  Bottom 0.406: 37.78,8.57 43.94,8.57 arc45 45.35,9.16 47.67,11.48 arc45 48.26,12.89 IC14.11 | 37.78,7.94 R41.1 37.78,8.57 | 37.78,8.57 IC3.1
DIN_A
  Top 0.61: IC21.10 3.17,12.06 JP7.6
DIN_B
  Bottom 0.61: IC14.10 49.53,12.06 JP8.6
DOUT_A  (via drill 0.5)
  Top 0.406: v1.91,73.34 IC13.9
  Bottom 1.016: v1.91,73.34 JP6.6
DOUT_B  (via drill 0.5)
  Top 1.016: v50.8,73.34 JP5.6
  Bottom 0.61: v50.8,73.34 IC24.9
GND  (via drill 0.5)
  other vias: 13.65,7.3 8.26,27.62 13.65,47.94 13.65,58.1 13.65,68.26 13.65,78.42 1.59,82.55 1.59,62.23 1.59,41.91 13.65,17.46 17.46,86.68 17.46,76.52 17.46,66.36 17.46,56.2 17.46,46.04 17.46,35.88 17.46,25.72 17.46,15.56 1.59,21.59 8.26,47.94 8.26,68.26 13.65,37.78 13.65,25.72 13.65,27.62 8.26,25.72 13.65,86.68 6.35,85.72 13.65,66.36 8.26,66.36 13.65,46.04 8.26,46.04 35.24,76.52 35.24,86.68 35.24,66.36 35.24,56.2 35.24,46.04 35.24,35.88 35.24,25.72 35.24,15.56 39.05,17.46 39.05,37.78 39.05,58.1 39.05,78.42 39.05,86.68 51.12,82.55 51.12,62.23 51.12,41.91 51.12,21.59 1.59,29.21 1.59,24.13 1.59,44.45 1.59,49.53 1.59,69.85 1.59,65.09 39.05,7.3 39.05,27.62 39.05,25.72 39.05,46.04 39.05,47.94 39.05,66.36 39.05,68.26 44.45,68.26 44.45,66.36 47.31,9.21 45.4,5.4 44.45,27.62 44.45,25.72 44.45,47.94 44.45,46.04 45.72,88.58 46.35,85.72 5.4,9.21 7.3,5.08 2.54,9.21 3.49,6.03 48.9,5.4 50.48,9.84 51.12,24.13 51.12,29.21 51.12,49.53 51.12,44.45 51.12,64.77 51.12,69.85 49.21,88.58 49.53,85.72 6.99,88.58 3.49,88.58 3.17,85.72
  pour Top (isolate 0.406): 0.32,0.32 52.39,0.32 52.39,99.69 0.32,99.69
  pour Bottom (isolate 0.406): 0.32,0.32 52.39,0.32 52.39,99.69 0.32,99.69
KI1
  Top 0.406: R64.1 JP1.1 26.04,86.36 23.31,83.64 arc-45 22.61,83.34 22.32,83.34 arc-45 21.61,83.64 21.57,83.69 arc-45 21.27,84.39 IC12.9
  Bottom 0.406: R80.2 JP1.1 26.67,86.36 29.39,83.64 arc45 30.1,83.34 30.38,83.34 arc65 31.09,83.64 31.14,83.69 arc45 31.43,84.39 IC23.9
KI2
  Top 0.406: R63.1 JP1.2 26.04,83.82 23.37,82.64 arc-24 22.96,82.55 21.15,82.55 arc-45 19.73,83.14 18.73,84.14 IC12.11
  Bottom 0.406: R79.2 JP1.2 26.67,83.82 28.82,82.72 arc24 29.95,82.55 31.87,82.55 arc45 33.29,83.14 33.68,83.53 arc45 33.97,84.23 IC23.11
KI3
  Top 0.406: R62.1 JP1.3 22.7,81.76 21.05,81.76 arc45 20.34,81.46 20.3,81.41 arc45 20,80.71 IC12.5
  Bottom 0.406: R78.2 JP1.3 30,81.76 31.87,81.76 arc-45 32.65,81.17 32.7,80.96 IC23.5
KI4
  Top 0.406: IC12.7 22.6,79.31 JP1.4 R61.1
  Bottom 0.406: R77.2 JP1.4 30.1,79.31 IC23.7
KI5
  Top 0.406: R60.1 JP1.5 26.04,76.2 23.31,73.48 arc-45 22.61,73.18 22.32,73.18 arc-45 21.61,73.48 21.57,73.53 arc-45 21.27,74.23 IC11.9
  Bottom 0.406: R76.2 JP1.5 26.67,76.2 29.39,73.48 arc45 30.1,73.18 30.38,73.18 arc45 31.09,73.48 31.14,73.53 arc45 31.43,74.23 IC22.9
KI6
  Top 0.406: R59.1 JP1.6 26.04,73.66 23.37,72.48 arc-24 22.96,72.39 21.15,72.39 arc-45 19.73,72.98 18.73,73.98 IC11.11
  Bottom 0.406: R75.2 JP1.6 26.67,73.66 29.17,72.48 arc25 29.59,72.39 31.56,72.39 arc45 32.97,72.98 33.68,73.53 arc45 33.97,74.39 IC22.11
KI7
  Top 0.406: R58.1 JP1.7 22.7,71.6 21.05,71.6 arc45 20.34,71.3 20.3,71.25 arc45 20,70.55 IC11.5
  Bottom 0.406: R74.2 JP1.7 30,71.6 31.65,71.6 arc-45 32.36,71.3 32.41,71.25 arc-45 32.7,70.55 IC22.5
KI8
  Top 0.406: R57.1 JP1.8 22.6,69.16 IC11.7
  Bottom 0.406: R73.2 JP1.8 30.1,69.16 IC22.7
KI9
  Top 0.406: R88.1 JP3.1 26.04,66.04 23.31,63.32 arc-45 22.61,63.02 22.32,63.02 arc-45 21.61,63.32 21.57,63.37 arc-45 21.27,64.07 IC9.9
  Bottom 0.406: 31.43,64.77 IC19.9 31.43,64.07 arc-45 31.14,63.37 31.09,63.32 arc-45 30.38,63.02 30.1,63.02 arc-45 29.39,63.32 26.67,66.04 JP3.1 R96.2
KI10
  Top 0.406: R87.1 JP3.2 23.36,62.3 arc-22 22.98,62.23 21.15,62.23 arc-45 19.73,62.82 18.73,63.82 IC9.11
  Bottom 0.406: R95.2 JP3.2 29.35,62.3 arc22 29.72,62.23 31.87,62.23 arc45 33.29,62.82 33.68,63.21 arc45 33.97,63.91 IC19.11
KI11
  Top 0.406: R86.1 JP3.3 22.7,61.44 21.21,61.44 arc45 20.5,61.14 20,60.64 IC9.5
  Bottom 0.406: IC19.5 32.7,60.39 arc45 32.41,61.09 32.36,61.14 arc45 31.65,61.44 30,61.44 JP3.3 R94.2
KI12
  Top 0.406: R85.1 JP3.4 24.23,58.42 arc-45 22.57,59.19 22.44,58.99 IC9.7
  Bottom 0.406: R93.2 JP3.4 30.1,58.99 IC19.7
KI13
  Top 0.406: R84.1 JP3.5 26.04,55.88 23.31,53.16 arc-45 22.61,52.86 22.32,52.86 arc-45 21.61,53.16 21.57,53.21 arc-45 21.27,53.91 IC8.9
  Bottom 0.406: R92.2 JP3.5 26.67,55.88 29.39,53.16 arc45 30.1,52.86 30.38,52.86 arc45 31.09,53.16 31.14,53.21 arc45 31.43,53.91 IC18.9
KI14
  Top 0.406: R83.1 JP3.6 26.04,53.34 23.37,52.16 arc-24 22.96,52.07 21.15,52.07 arc-45 19.73,52.66 18.73,53.66 IC8.11
  Bottom 0.406: R91.2 JP3.6 26.67,53.34 29.33,52.16 arc24 29.74,52.07 31.56,52.07 arc45 32.97,52.66 33.97,53.66 IC18.11
KI15
  Top 0.406: R82.1 JP3.7 22.7,51.28 21.21,51.28 arc45 20.5,50.98 20.3,50.77 arc45 20,50.07 IC8.5
  Bottom 0.406: R90.2 JP3.7 30,51.28 31.65,51.28 32.36,50.98 32.41,50.93 arc-45 32.7,50.23 IC18.5
KI16
  Top 0.406: R81.1 JP3.8 22.6,48.84 IC8.7
  Bottom 0.406: R89.2 JP3.8 30.1,48.84 IC18.7
KI17
  Top 0.406: R104.1 JP2.1 26.04,45.72 23.31,43 arc-45 22.61,42.7 22.32,42.7 arc-45 21.61,43 21.57,43.05 arc-45 21.27,43.75 IC6.9
  Bottom 0.406: R112.2 JP2.1 26.67,45.72 29.39,43 arc45 30.1,42.7 30.38,42.7 arc45 31.09,43 31.14,43.05 arc45 31.43,43.75 IC16.9
KI18
  Top 0.406: R103.1 JP2.2 26.04,43.18 23.37,42 arc-24 22.96,41.91 21.15,41.91 arc-45 19.73,42.5 18.73,43.5 IC6.11
  Bottom 0.406: R111.2 JP2.2 26.67,43.18 29.33,42 arc24 29.74,41.91 31.56,41.91 arc45 32.97,42.5 33.97,43.5 IC16.11
KI19
  Top 0.406: R102.1 JP2.3 22.77,41.11 arc5 22.64,41.12 21.05,41.12 arc45 20.34,40.82 20.3,40.77 arc45 20,40.07 IC6.5
  Bottom 0.406: R110.2 JP2.3 30,41.12 31.65,41.12 32.36,40.82 32.41,40.77 arc-45 32.7,40.07 IC16.5
KI20
  Top 0.406: R101.1 JP2.4 22.6,38.67 IC6.7
  Bottom 0.406: R109.2 JP2.4 30.1,38.67 IC16.7
KI21
  Top 0.406: R100.1 JP2.5 26.04,35.56 23.31,32.84 arc-45 22.61,32.54 22.32,32.54 arc-45 21.61,32.84 21.57,32.89 arc-45 21.27,33.59 IC5.9
  Bottom 0.406: R108.2 JP2.5 26.67,35.56 29.39,32.84 arc45 30.1,32.54 30.38,32.54 arc45 31.09,32.84 31.14,32.89 arc45 31.43,33.59 IC15.9
KI22
  Top 0.406: R99.1 JP2.6 26.04,33.02 23.37,31.84 arc-24 22.96,31.75 21.15,31.75 arc-45 19.73,32.34 18.73,33.34 IC5.11
  Bottom 0.406: R107.2 JP2.6 26.67,33.02 29.33,31.84 arc24 29.74,31.75 31.56,31.75 arc45 32.97,32.34 33.97,33.34 IC15.11
KI23
  Top 0.406: R98.1 JP2.7 22.7,30.96 21.05,30.96 arc45 20.34,30.66 20.3,30.61 arc45 20,29.91 IC5.5
  Bottom 0.406: R106.2 JP2.7 30,30.96 31.65,30.96 arc-45 32.36,30.66 32.41,30.61 arc-45 32.7,29.91 IC15.5
KI24
  Top 0.406: R97.1 JP2.8 22.6,28.52 IC5.7
  Bottom 0.406: R105.2 JP2.8 30.1,28.52 IC15.7
KI25
  Top 0.406: R120.1 JP4.1 26.04,25.4 23.31,22.68 arc-45 22.61,22.38 22.32,22.38 arc-45 21.61,22.68 21.57,22.73 arc-45 21.27,23.43 IC2.9
  Bottom 0.406: R128.2 JP4.1 26.67,25.4 29.39,22.68 arc45 30.1,22.38 30.38,22.38 arc40 31.09,22.68 31.14,22.73 arc45 31.43,23.43 IC4.9
KI26
  Top 0.406: R119.1 JP4.2 26.04,22.86 23.18,21.59 21.15,21.59 arc-45 19.73,22.18 18.73,23.18 IC2.11
  Bottom 0.406: R127.2 JP4.2 26.67,22.86 29.33,21.68 arc24 29.74,21.59 31.56,21.59 arc45 32.97,22.18 33.97,23.18 IC4.11
KI27
  Top 0.406: R118.1 JP4.3 22.7,20.8 21.05,20.8 arc45 20.34,20.5 20.3,20.45 arc45 20,19.75 IC2.5
  Bottom 0.406: R126.2 JP4.3 30,20.8 31.87,20.8 arc-45 32.65,20.21 32.7,20 IC4.5
KI28
  Top 0.406: R117.1 JP4.4 22.6,18.36 IC2.7
  Bottom 0.406: R125.2 JP4.4 30.1,18.36 IC4.7
KI29
  Top 0.406: R116.1 JP4.5 26.04,15.24 23.31,12.52 arc-45 22.61,12.22 22.32,12.22 arc-45 21.61,12.52 21.57,12.57 arc-45 21.27,13.27 IC1.9
  Bottom 0.406: R124.2 JP4.5 26.67,15.24 29.39,12.52 arc45 30.1,12.22 30.38,12.22 arc45 31.09,12.52 31.14,12.57 arc45 31.43,13.27 IC3.9
KI30
  Top 0.406: R115.1 JP4.6 26.04,12.7 23.37,11.52 arc-24 22.96,11.43 21.15,11.43 arc-45 19.73,12.02 18.73,13.02 IC1.11
  Bottom 0.406: R123.2 JP4.6 26.67,12.7 29.33,11.52 arc24 29.74,11.43 31.56,11.43 arc45 32.97,12.02 33.97,13.02 IC3.11
KI31
  Top 0.406: R114.1 JP4.7 22.7,10.64 21.05,10.64 arc45 20.34,10.34 20.3,10.29 arc45 20,9.59 IC1.5
  Bottom 0.406: R122.2 JP4.7 30,10.64 31.65,10.64 arc-45 32.36,10.34 32.41,10.29 arc-45 32.7,9.59 IC3.5
KI32
  Top 0.406: R113.1 JP4.8 22.6,8.2 IC1.7
  Bottom 0.406: R121.2 JP4.8 30.1,8.2 IC3.7
LATCH_A  (via drill 0.3)
  Top 0.406: v10.79,60.96 IC10.1 | v10.79,40.64 IC7.1 | v10.79,20.32 IC21.1 | v10.79,81.28 IC13.1
  Bottom 0.813: JP6.4 v10.79,81.28 v10.79,60.96 v10.79,40.64 v10.79,20.32 10.79,6.99 JP7.4
LATCH_B  (via drill 0.3)
  Top 0.813: JP5.4 v41.91,81.28 v41.91,60.96 v41.91,40.64 v41.91,20.32 41.91,6.03 JP8.4
  Bottom 0.61: v41.91,81.28 IC24.1 | v41.91,40.64 IC17.1 | v41.91,60.96 IC20.1 | v41.91,20.32 IC14.1
N$1  (via drill 0.5)
  Top 1.016: v50.8,12.38 49.54,22.8 arc-7 49.53,22.92 v49.53,30.48
  Bottom 0.406: 50.8,13.65 IC14.9 v50.8,12.38
  Bottom 0.61: v49.53,30.48 IC17.10
N$2  (via drill 0.5)
  Top 1.016: v50.8,32.7 49.54,42.48 arc-7 49.53,42.61 v49.53,51.12
  Bottom 0.406: v50.8,32.7 IC17.9
  Bottom 0.61: v49.53,51.12 IC20.10
N$4
  Top 0.406: IC13.5 5.71,81.09 arc-45 6.3,82.5 7.67,83.87 arc-45 9.08,84.45 11.04,84.45 arc-22 11.79,84.31 14.43,83.26 arc22 14.8,83.19 15.14,83.19 arc45 15.85,83.48 15.9,83.53 arc45 16.19,84.23 IC12.13 R15.1
N$5  (via drill 0.5)
  Top 1.016: v50.8,53.34 49.54,62.48 arc-8 49.53,62.62 v49.53,71.12
  Bottom 0.406: 50.8,54.29 IC20.9 v50.8,53.34
  Bottom 0.61: v49.53,71.12 IC24.10
N$7
  Top 0.035: 21.27,98.74 30.32,98.74
N$8
  Top 0.035: 21.27,98.58 30.32,98.58
N$9
  Top 0.406: IC13.4 6.99,81.09 arc-45 7.57,82.5 7.99,82.92 arc-45 9.4,83.5 10.99,83.5 arc-25 11.83,83.31 15.62,81.55 arc-65 16.19,80.64 IC12.2 R14.1
N$10
  Top 0.406: IC13.3 8.26,81.09 arc-45 8.52,82.03 8.99,82.43 arc-28 9.46,82.55 10.92,82.55 arc-29 11.88,82.31 14.92,80.64 IC12.1 R13.1
N$11
  Top 0.406: IC13.14 8.26,73.09 arc45 8.3,73.14 arc45 9.72,72.39 10.92,72.39 arc29 11.88,72.63 14.92,74.3 IC11.14 R12.1
N$12  (via drill 0.5)
  Top 0.406: v1.91,12.38 IC21.9
  Top 0.61: v3.17,30.48 IC7.10
  Bottom 1.016: v1.91,12.38 3.16,20.24 arc9 3.17,20.4 v3.17,30.48
N$13
  Top 0.406: IC13.13 6.99,73.85 arc45 7.57,72.44 7.99,72.02 arc45 9.4,71.44 10.99,71.44 arc25 11.83,71.62 15.14,72.92 arc65 16.19,74.3 IC11.13 R11.1
N$14
  Top 0.406: IC13.12 5.71,73.85 arc45 6.3,72.44 7.67,71.07 arc45 9.08,70.48 11.04,70.48 arc22 11.79,70.63 14.43,71.68 arc-22 14.8,71.75 15.14,71.75 arc-45 15.85,71.46 15.9,71.41 arc-45 16.19,70.71 IC11.2 R10.1
N$17
  Top 0.406: IC10.12 5.71,53.53 arc45 6.3,52.12 7.67,50.75 arc45 9.08,50.16 11.04,50.16 arc22 11.79,50.31 14.43,51.36 arc-22 14.8,51.44 15.14,51.44 arc-45 15.85,51.14 15.9,51.09 arc-45 16.19,50.39 IC8.2 R18.1
N$18
  Top 0.406: IC10.13 6.99,53.53 arc45 7.57,52.12 7.99,51.7 arc45 9.4,51.12 10.99,51.12 arc25 11.83,51.3 15.14,52.59 arc65 16.19,53.98 IC8.13 R19.1 16.19,55.56
N$19
  Top 0.406: IC10.14 8.26,52.77 arc45 8.3,52.66 arc45 9.72,52.07 10.92,52.07 arc29 11.88,52.31 14.92,53.98 IC8.14 14.92,55.56 14.78,55.55 R20.1
N$20
  Top 0.406: IC10.3 8.26,60.77 arc-45 8.84,62.18 arc-45 8.96,62.23 10.92,62.23 arc-29 11.88,61.99 14.92,60.33 IC9.1 R21.1
N$21
  Top 0.406: IC10.4 6.99,60.77 arc-45 7.57,62.18 7.99,62.6 arc-45 9.4,63.18 10.99,63.18 arc-25 11.83,62.99 15.62,61.23 arc-65 16.19,60.32 IC9.2 R22.1 16.19,58.74
N$22  (via drill 0.5)
  Top 0.406: v1.91,32.7 IC7.9
  Top 0.61: v3.17,50.8 IC10.10
  Bottom 1.016: v1.91,32.7 3.16,40.56 arc9 3.17,40.72 v3.17,50.8
N$23
  Top 0.406: IC10.5 5.71,60.77 arc-45 6.3,62.18 7.67,63.55 arc-45 9.08,64.14 11.04,64.14 arc-22 11.79,63.99 14.43,62.94 arc22 14.8,62.87 15.14,62.87 arc45 15.85,63.16 15.9,63.21 arc45 16.19,63.91 IC9.13 R23.1
N$25  (via drill 0.5)
  Top 0.406: v1.91,53.02 IC10.9
  Top 0.61: v3.17,71.22 IC13.10
  Bottom 1.016: v1.91,53.02 3.16,60.88 arc9 3.17,61.04 v3.17,71.22
N$27
  Top 0.406: IC7.12 5.71,33.21 arc45 6.3,31.8 7.67,30.43 arc45 9.08,29.84 11.04,29.84 arc22 11.79,29.99 14.43,31.04 arc-22 14.8,31.11 15.14,31.11 arc-45 15.85,30.82 15.9,30.77 arc-45 16.19,30.07 IC5.2 R26.1 16.19,28.26
N$28
  Top 0.406: IC7.13 6.99,33.21 arc45 7.57,31.8 7.99,31.38 arc45 9.4,30.8 10.99,30.8 arc25 11.83,30.98 15.3,32.43 arc65 16.19,33.66 IC5.13 R27.1
N$29
  Top 0.406: IC7.14 8.26,32.45 arc45 8.3,32.34 arc45 9.72,31.75 10.92,31.75 arc29 11.88,31.99 14.92,33.66 IC5.14 R28.1
N$30
  Top 0.406: IC7.3 8.26,40.45 arc-45 8.84,41.86 arc-45 8.96,41.91 10.92,41.91 arc-29 11.88,41.67 14.92,40.01 IC6.1 R29.1
N$31
  Top 0.035: 21.27,98.42 30.32,98.42
N$32
  Top 0.035: 21.27,98.27 30.32,98.27
N$33
  Top 0.406: IC7.4 6.99,40.45 arc-45 7.57,41.86 7.99,42.28 arc-45 9.4,42.86 10.99,42.86 arc-25 11.83,42.67 15.62,40.91 arc-65 16.19,40 IC6.2 R30.1
N$35
  Top 0.406: IC7.5 5.71,40.45 arc-45 6.3,41.86 7.67,43.23 arc-45 9.08,43.81 11.04,43.81 arc-22 11.79,43.67 14.43,42.62 arc22 14.8,42.55 15.14,42.55 arc45 15.85,42.84 15.9,42.89 arc45 16.19,43.59 IC6.13 R31.1
N$38
  Top 0.406: IC21.12 5.71,12.89 arc45 6.3,11.48 7.67,10.11 arc45 9.08,9.53 11.04,9.53 arc22 11.79,9.67 14.43,10.72 arc-22 14.8,10.79 15.14,10.79 arc-45 15.85,10.5 15.9,10.45 arc-45 16.19,9.75 IC1.2 R34.1 16.19,7.94
N$39
  Top 0.406: IC21.13 6.99,12.89 arc45 7.57,11.48 7.99,11.06 arc45 9.4,10.48 10.99,10.48 arc25 11.83,10.66 15.3,12.11 arc65 16.19,13.34 IC1.13 R35.1
N$40
  Top 0.406: 14.92,13.97 14.92,13.34 11.88,11.67 arc-29 10.92,11.43 9.72,11.43 arc-45 8.3,12.02 arc-45 8.26,12.13 IC21.14 | 14.92,13.97 IC1.14 | 14.92,13.97 R36.1
N$41
  Top 0.406: IC21.3 8.26,20.89 arc-45 8.3,21 arc-45 9.72,21.59 10.92,21.59 arc-29 11.88,21.35 14.92,19.68 IC2.1 R37.1
N$42
  Top 0.406: IC21.4 6.99,20.13 arc-45 7.57,21.54 7.99,21.96 arc-45 9.4,22.54 10.99,22.54 arc-25 11.83,22.36 15.62,20.59 arc-65 16.19,19.68 IC2.2 R38.1
N$43
  Top 0.406: IC21.5 5.71,20.13 arc-45 6.3,21.54 7.67,22.91 arc-45 9.08,23.5 11.04,23.5 arc-22 11.79,23.35 14.43,22.3 arc22 14.8,22.23 15.14,22.23 arc45 15.85,22.52 15.9,22.57 arc45 16.19,23.27 IC2.13 R39.1
N$46
  Bottom 0.406: IC24.12 46.99,73.85 arc-45 46.4,72.44 45.04,71.07 arc-45 43.62,70.48 41.63,70.48 arc-20 40.94,70.61 38.27,71.78 arc47 37.17,71.69 arc36 36.51,70.81 IC22.2
  Bottom 0.61: 36.51,68.9 R50.1 IC22.2
N$47
  Bottom 0.406: IC24.13 45.72,73.85 arc-45 45.13,72.44 44.72,72.02 arc-45 43.3,71.44 41.72,71.44 arc-25 40.87,71.62 37.09,73.39 arc-65 36.51,74.3 36.51,74.93
  Bottom 0.61: IC22.13 36.51,74.93 R51.1
N$48
  Bottom 0.406: IC24.14 44.45,73.09 arc-45 44.4,72.98 arc-45 42.99,72.39 41.78,72.39 arc-29 40.83,72.63 37.78,74.3
  Bottom 0.61: IC22.14 37.78,74.3 R52.1
N$49
  Bottom 0.406: IC23.1 37.78,80.64 40.83,82.31 arc-29 41.78,82.55 42.99,82.55 arc-45 44.4,81.96 arc-45 44.45,81.84 IC24.3
  Bottom 0.61: 37.78,79.06 R53.1 IC23.1
N$50
  Bottom 0.406: IC24.4 45.72,81.09 arc45 45.13,82.5 44.72,82.92 arc45 43.3,83.5 41.72,83.5 arc25 40.87,83.31 37.57,82.18 arc65 36.51,80.64 IC23.2
  Bottom 0.61: 36.51,79.06 R54.1 IC23.2
N$51
  Bottom 0.406: IC24.5 46.99,81.09 arc45 46.4,82.5 45.04,83.87 arc45 43.62,84.45 41.63,84.45 arc20 40.94,84.33 38.59,83.48 arc-47 36.7,83.57 36.51,83.82 36.51,85.09
  Bottom 0.61: IC23.13 36.51,85.09 R55.1
N$54
  Bottom 0.406: IC20.12 46.99,53.53 arc-45 46.4,52.12 45.04,50.75 arc-45 43.62,50.16 41.63,50.16 arc-20 40.94,50.28 38.57,51.21 arc56 37.17,51.26 36.94,51.1 arc55 36.51,50.28 IC18.2 R66.1 36.51,48.58
N$55
  Bottom 0.406: IC20.13 45.72,53.53 arc-45 45.13,52.12 44.72,51.7 arc-45 43.3,51.12 41.66,51.12 arc-22 40.92,51.26 37.14,52.77 arc-68 36.51,53.7 36.51,54.61 | 36.51,54.61 IC18.13 | 36.51,54.61 R67.1
N$56
  Bottom 0.406: IC20.14 44.45,52.77 arc-45 44.4,52.66 arc-45 42.99,52.07 41.92,52.07 arc-36 40.75,52.45 37.78,54.61 IC18.14 R68.1
N$57
  Bottom 0.406: IC20.3 44.45,61.52 arc45 44.4,61.64 arc45 42.99,62.23 41.78,62.23 arc29 40.83,61.99 37.78,60.33 IC19.1 R69.1 37.78,58.74
N$58
  Bottom 0.406: IC20.4 45.72,60.77 arc45 45.13,62.18 44.72,62.6 arc45 43.3,63.18 41.72,63.18 arc25 40.87,62.99 37.25,61.71 arc65 36.51,60.32 IC19.2 R70.1 36.51,58.74
N$59
  Bottom 0.406: 36.51,64.77 36.51,63.65 arc36 37.33,62.93 arc47 38.59,63.16 40.94,64.02 arc-20 41.63,64.14 43.62,64.14 arc-45 45.04,63.55 46.4,62.18 arc-45 46.99,60.77 IC20.5 46.99,60.01
  Bottom 0.61: IC19.13 36.51,64.77 R71.1
N$62
  Bottom 0.406: IC17.12 46.99,33.21 arc-45 46.4,31.8 45.04,30.43 arc-45 43.62,29.84 41.63,29.84 arc-20 40.94,29.96 38.59,30.82 arc47 36.7,30.73 36.51,30.48 IC15.2 R2.1 36.51,28.26
N$63
  Bottom 0.406: IC17.13 45.72,33.21 arc-45 45.13,31.8 44.72,31.38 arc-45 43.3,30.8 41.72,30.8 arc-25 40.87,30.98 37.73,32.12 arc-65 36.51,33.66 36.51,34.29 | 36.51,34.29 IC15.13 | 36.51,34.29 R3.1
N$64
  Bottom 0.406: IC17.14 44.45,32.45 arc-45 44.4,32.34 arc-45 42.99,31.75 41.92,31.75 arc-36 40.75,32.13 37.78,34.29 | 37.78,34.29 IC15.14 | R4.1 37.78,34.29
N$65
  Bottom 0.406: IC17.3 44.45,41.2 arc45 44.4,41.32 arc45 42.99,41.91 41.78,41.91 arc29 40.83,41.67 37.78,40.01 IC16.1 R5.1 37.78,38.42
N$66
  Bottom 0.406: IC17.4 45.72,40.45 arc45 45.13,41.86 44.72,42.28 arc45 43.3,42.86 41.72,42.86 arc25 40.87,42.67 37.73,41.54 arc65 36.51,40 IC16.2 R6.1 36.51,38.42
N$67
  Bottom 0.406: IC17.5 46.99,40.45 arc45 46.4,41.86 45.04,43.23 arc45 43.62,43.81 41.63,43.81 arc20 40.94,43.7 38.43,42.68 arc-47 36.85,42.77 36.51,43.18 36.51,44.45 | 36.51,44.45 IC16.13 | 36.51,44.45 R7.1
N$70
  Bottom 0.406: IC14.12 46.99,12.89 arc-45 46.4,11.48 45.04,10.11 arc-45 43.62,9.53 41.63,9.53 arc-20 40.94,9.64 38.59,10.5 arc47 36.7,10.41 arc36 36.51,9.85 IC3.2 R42.1 36.51,7.94
N$71
  Bottom 0.406: IC14.13 45.72,12.89 arc-45 45.13,11.48 44.72,11.06 arc-45 43.3,10.48 41.72,10.48 arc-25 40.87,10.66 37.98,11.69 arc-65 36.51,13.02 | 36.51,13.02 IC3.13 | 36.51,13.02 R43.1
N$72
  Bottom 0.406: 37.78,13.97 40.75,11.81 arc36 41.92,11.43 42.99,11.43 arc45 44.4,12.02 arc45 44.45,12.13 IC14.14 | 37.78,13.97 IC3.14 | R44.1 37.78,13.97
N$73
  Bottom 0.406: IC14.3 44.45,20.89 arc45 44.4,21 arc45 42.99,21.59 41.92,21.59 arc36 40.75,21.21 37.78,19.05 IC4.1 R45.1 37.78,18.1
N$74
  Bottom 0.406: IC14.4 45.72,20.13 arc45 45.13,21.54 44.72,21.96 arc45 43.3,22.54 41.72,22.54 arc25 40.87,22.36 37.41,21.22 arc65 36.51,19.68 IC4.2 R46.1 36.51,18.1
N$75
  Bottom 0.406: IC14.5 46.99,20.13 arc45 46.4,21.54 45.04,22.91 arc45 43.62,23.5 41.63,23.5 arc20 40.94,23.38 38.59,22.52 arc-47 36.7,22.61 36.51,22.86 36.51,24.13 | 36.51,24.13 IC4.13 | 36.51,24.13 R47.1
N$77
  Top 0.1: 21.27,97.95 30.32,97.95
N$78
  Top 0.1: 21.27,97.63 30.32,97.63
N$79
  Top 0.1: 21.27,97.31 30.32,97.31
N$80
  Top 0.1: 21.27,97 30.32,97
N$81
  Top 0.035: 21.27,96.52 30.32,96.52
N$82
  Top 0.035: 21.27,96.36 30.32,96.36
N$83
  Top 0.035: 21.27,96.2 30.32,96.2
N$84
  Top 0.035: 21.27,96.04 30.32,96.04
VREF_A_COMP  (via drill 0.5)
  Top 0.406: 20.64,57.47 19.78,57.47 arc-45 19.07,57.76 19.02,57.81 arc-45 18.73,58.52 IC9.4 | 21.27,59.69 IC9.6 21.27,58.52 arc-45 20.98,57.81 20.64,57.47 | 20.64,67.63 19.78,67.63 arc-45 19.07,67.92 19.02,67.97 arc-45 18.73,68.68 IC11.4 | 21.27,69.85 IC11.6 21.27,68.68 arc-45 20.98,67.97 20.64,67.63 | 20.64,66.99 20.3,66.65 arc45 20,65.94 IC9.10 | 20.64,66.99 21.49,66.99 arc-45 22.2,66.7 22.25,66.65 arc-45 22.54,65.94 IC9.8 22.54,64.77 | 20.64,56.83 20.3,56.49 arc45 20,55.78 IC8.10 | 22.54,54.61 IC8.8 22.54,55.78 arc45 22.25,56.49 22.2,56.54 arc45 21.49,56.83 20.64,56.83 | IC8.4 18.73,48.36 arc45 19.02,47.65 19.07,47.6 arc45 19.78,47.31 20.64,47.31 | 21.27,49.53 IC8.6 21.27,48.36 arc-45 20.98,47.65 20.64,47.31 | 20.64,46.67 20.3,46.33 arc45 20,45.62 IC6.10 | 22.54,44.45 IC6.8 22.54,45.62 arc45 22.25,46.33 22.2,46.38 arc45 21.49,46.67 20.64,46.67 | 20.64,37.15 19.78,37.15 arc-45 19.07,37.44 19.02,37.49 arc-45 18.73,38.2 IC6.4 | 21.27,39.37 IC6.6 21.27,38.2 arc-45 20.98,37.49 20.64,37.15 | 20.64,36.51 20.3,36.17 arc45 20,35.46 IC5.10 | 22.54,34.29 IC5.8 22.54,35.46 arc45 22.25,36.17 22.2,36.22 arc45 21.49,36.51 20.64,36.51 | 20.64,26.99 19.78,26.99 arc-45 19.07,27.28 19.02,27.33 arc-45 18.73,28.04 IC5.4 | 21.27,29.21 IC5.6 21.27,28.04 arc-45 20.98,27.33 20.64,26.99 | 20.64,26.35 20.3,26.01 arc45 20,25.3 IC2.10 | 20.64,26.35 21.49,26.35 arc-45 22.2,26.06 22.25,26.01 arc-45 22.54,25.3 IC2.8 22.54,24.13 | 20.64,16.83 19.78,16.83 arc-45 19.07,17.12 19.02,17.17 arc-45 18.73,17.88 IC2.4 | 21.27,19.05 IC2.6 21.27,17.88 arc-45 20.98,17.17 20.64,16.83 | 20.64,16.19 20.3,15.85 arc45 20,15.14 IC1.10
  Top 0.406: 20.64,16.19 21.49,16.19 arc-45 22.2,15.9 22.25,15.85 arc-45 22.54,15.14 IC1.8 | IC1.4 18.73,7.72 arc45 19.02,7.01 19.07,6.96 arc45 19.78,6.67 20.64,6.67 | 21.27,8.89 IC1.6 21.27,7.72 arc-45 20.98,7.01 20.64,6.67 | 20.64,77.15 20.3,76.81 arc45 20,76.1 IC11.10 | 22.54,74.93 IC11.8 22.54,76.1 arc45 22.25,76.81 22.2,76.86 arc45 21.49,77.15 20.64,77.15 | 20.64,77.79 19.78,77.79 arc-45 19.07,78.08 19.02,78.13 arc-45 18.73,78.84 IC12.4 | 21.27,80.01 IC12.6 21.27,78.84 arc-45 20.98,78.13 20.64,77.79 | 20.64,87.31 20.3,86.97 arc45 20,86.26 IC12.10 | 22.54,85.09 IC12.8 22.54,86.26 arc45 22.25,86.97 22.2,87.02 arc45 21.49,87.31 20.64,87.31 | 20.64,16.83 v20.64,16.51 20.64,16.19 | 20.64,26.99 v20.64,26.67 20.64,26.35 | 20.64,36.51 v20.64,36.83 20.64,37.15 | 20.64,46.67 v20.64,46.99 20.64,47.31 | 20.64,56.83 v20.64,57.15 20.64,57.47 | 20.64,66.99 v20.64,67.31 20.64,67.63 | 20.64,77.15 v20.64,77.47 20.64,77.79 | v20.64,87.63 20.64,87.31 | 20.64,6.67 v20.64,6.35
  Bottom 0.406: v20.64,87.63 C26.1 | 20.8,47.78 R129.1 | 20.8,47.78 20.95,47.62 | 20.64,47.94 20.8,47.78 | 20.64,46.2 R130.2 | v20.64,6.35 C25.1
  Bottom 1.016: v20.64,87.63 v20.64,77.47 v20.64,67.31 v20.64,57.15 20.64,47.94 v20.64,46.99 20.64,46.2 v20.64,36.83 v20.64,26.67 v20.64,16.51 v20.64,6.35
VREF_B_COMP  (via drill 0.5)
  Top 0.406: 32.07,7.94 R131.1 31.91,7.94
  Top 1.016: v32.07,6.67 32.07,7.94 v32.07,16.51 v32.07,26.67 v32.07,36.83 v32.07,46.99 v32.07,57.15 v32.07,67.31 v32.07,77.47 v32.07,87.31
  Bottom 0.406: 32.07,57.47 31.73,57.81 arc-45 31.43,58.52 IC19.6 | 32.07,57.47 32.92,57.47 arc45 33.63,57.76 33.68,57.81 arc45 33.97,58.52 IC19.4 33.97,59.69 | 32.07,26.99 31.73,27.33 arc-45 31.43,28.04 IC15.6 | 32.07,26.99 32.92,26.99 arc45 33.63,27.28 33.68,27.33 arc45 33.97,28.04 IC15.4 33.97,29.21 | 32.07,26.35 31.21,26.35 arc45 30.5,26.06 30.45,26.01 arc45 30.16,25.3 IC4.8 | 32.7,23.81 IC4.10 32.7,25.3 arc45 32.41,26.01 32.07,26.35 | 32.07,36.51 31.21,36.51 arc45 30.5,36.22 30.45,36.17 arc45 30.16,35.46 IC15.8 | 32.07,36.51 32.41,36.17 arc-45 32.7,35.46 IC15.10 | 32.07,37.15 31.73,37.49 arc-45 31.43,38.2 IC16.6 | 32.07,37.15 32.92,37.15 arc45 33.63,37.44 33.68,37.49 arc45 33.97,38.2 IC16.4 33.97,39.37 | v32.07,6.67 31.6,7.37 arc-34 31.43,7.92 IC3.6 | v32.07,6.67 32.61,6.67 arc45 33.31,6.96 33.68,7.33 arc45 33.97,8.03 IC3.4 33.97,8.89 | 32.07,16.19 32.12,16.14 arc-45 32.7,14.73 IC3.10 | 32.07,16.19 31.63,16.19 arc45 31,16.08 arc45 30.16,15.01 IC3.8 30.16,13.97 | 32.07,16.83 32.02,16.88 arc-45 31.43,18.29 IC4.6 | 32.07,16.83 32.51,16.83 arc45 32.65,16.78 arc45 33.97,17.69 IC4.4 33.97,19.05 | 32.07,46.67 31.21,46.67 arc45 30.5,46.38 30.45,46.33 arc45 30.16,45.62 IC16.8 | 32.7,44.45 IC16.10 32.7,45.62 arc45 32.41,46.33 32.07,46.67 | 32.07,47.31 31.73,47.65 arc-45 31.43,48.36 IC18.6 | 32.07,47.31 32.92,47.31 arc45 33.63,47.6 33.68,47.65 arc45 33.97,48.36 IC18.4 33.97,49.53 | IC18.8 30.16,55.78 arc-45 30.45,56.49 30.5,56.54 arc-45 31.21,56.83 32.07,56.83 | 32.07,56.83 32.41,56.49 arc-45 32.7,55.78 IC18.10 | 32.07,66.99 31.21,66.99 arc45 30.5,66.7 30.45,66.65 arc45 30.16,65.94 IC19.8
  Bottom 0.406: 32.7,64.77 IC19.10 32.7,65.94 arc45 32.41,66.65 32.07,66.99 | 32.07,67.63 31.73,67.97 arc-45 31.43,68.68 IC22.6 | 32.07,67.63 32.92,67.63 arc45 33.63,67.92 33.68,67.97 arc45 33.97,68.68 IC22.4 33.97,69.85 | 32.07,77.15 31.21,77.15 arc45 30.5,76.86 30.45,76.81 arc45 30.16,76.1 IC22.8 | 32.7,74.93 IC22.10 32.7,76.1 arc45 32.41,76.81 32.07,77.15 | 32.07,77.79 31.73,78.13 arc-45 31.43,78.84 IC23.6 | 32.07,77.79 32.92,77.79 arc45 33.63,78.08 33.68,78.13 arc45 33.97,78.84 IC23.4 33.97,80.01 | v32.07,87.31 31.53,87.31 arc45 30.82,87.02 30.45,86.65 arc45 30.16,85.95 IC23.8 | 32.7,85.09 IC23.10 32.7,86.26 arc45 32.41,86.97 v32.07,87.31 | 32.07,16.83 v32.07,16.51 32.07,16.19 | 32.07,26.35 v32.07,26.67 32.07,26.99 | 32.07,36.51 v32.07,36.83 32.07,37.15 | 32.07,46.67 v32.07,46.99 32.07,47.31 | 32.07,56.83 v32.07,57.15 32.07,57.47 | 32.07,66.99 v32.07,67.31 32.07,67.63 | 32.07,77.15 v32.07,77.47 32.07,77.79 | v32.07,87.31 C28.1 | C27.1 32.07,5.93 v32.07,6.67
  Bottom 0.813: C27.1 32.07,5.87 32.07,4.34 arc90 R132.2

## Text on the board
Top: TOP | keyScan PCB | Jannik | Svensson | 1984 | µ-san 2011
Bottom: BOTTOM